# Altium PCB [1]BMS_AFE.PcbDoc (part 3 of 3)
Units mm, origin at the board's own origin, x right, y up, seen from the top; angles counter-clockwise.
Board outline 110 x 135 mm, 4 copper layers (Top Layer, Layer 1, Layer 2, Bottom Layer), stack 2.022 mm thick; 197 components, 113 nets, 551 pads, 368 vias.
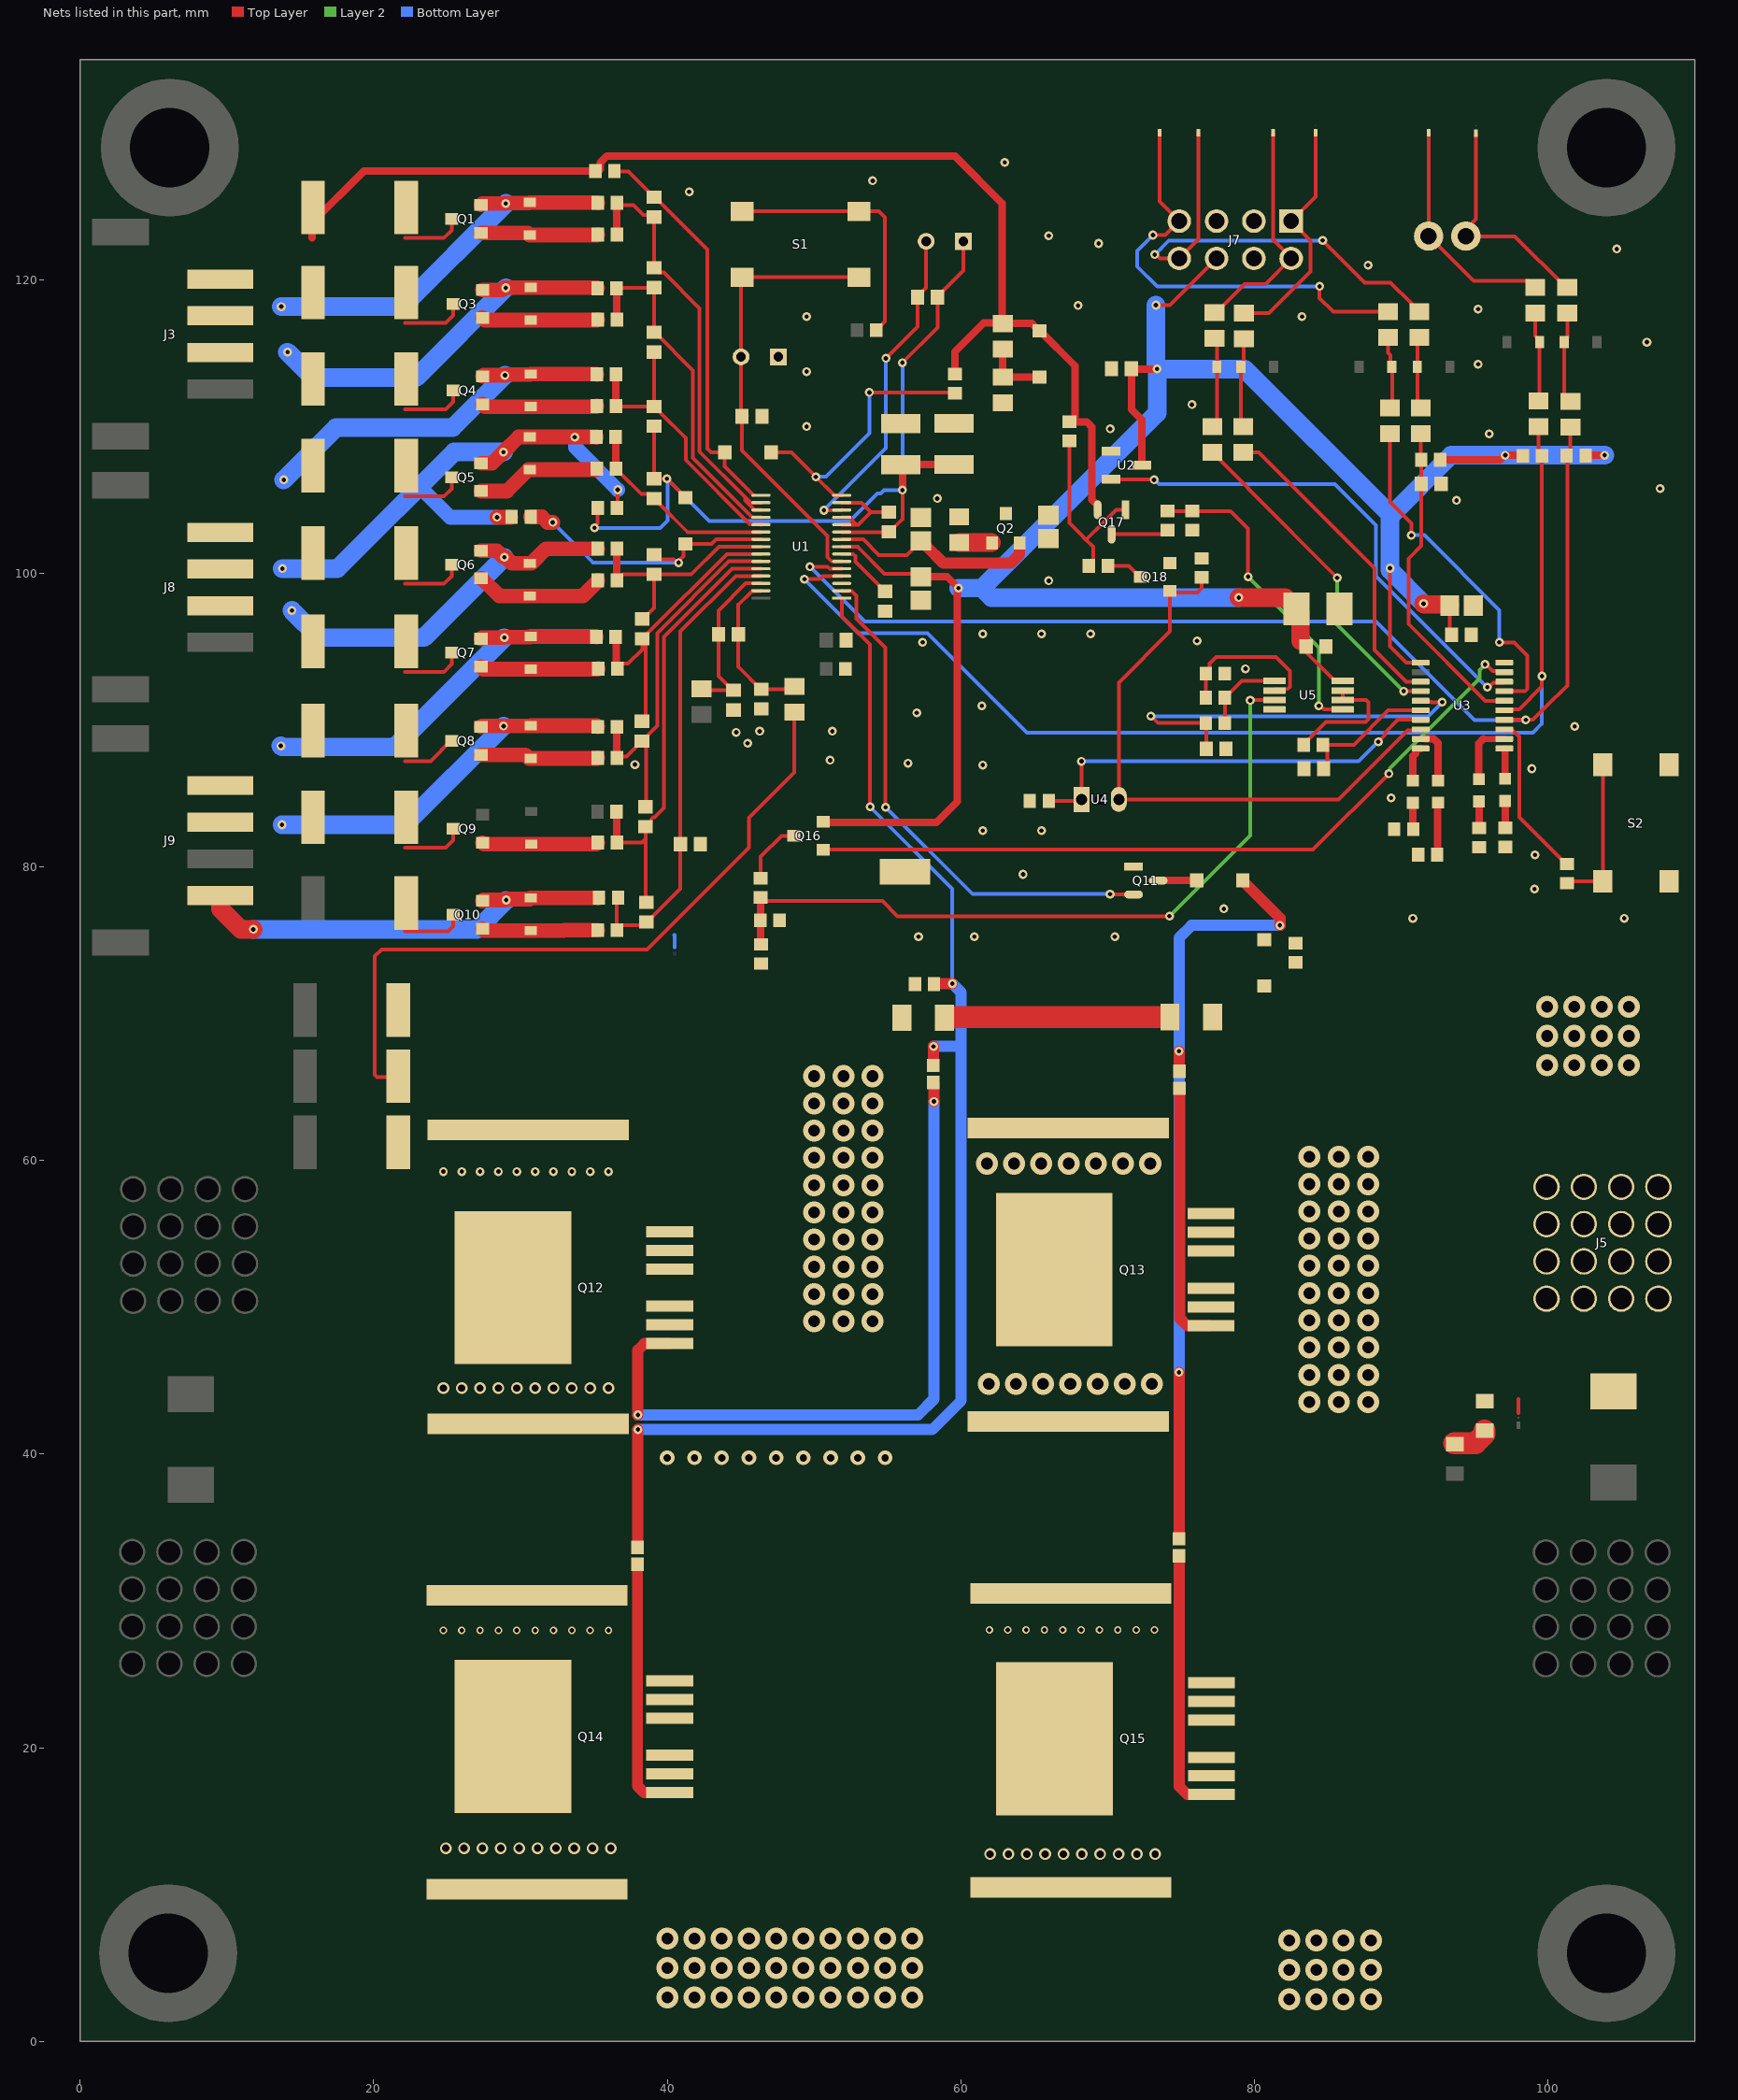
[diagram p4: the nets of this part, all layers, seen from the top]

## Via types
v1: diameter 1.5, hole 0.8, Top Layer to Bottom Layer, 164 vias
v2: diameter 0.61, hole 0.305, Top Layer to Bottom Layer, 135 vias
v3: diameter 0.8, hole 0.5, Top Layer to Bottom Layer, 30 vias
v4: diameter 0.5, hole 0.3, Top Layer to Bottom Layer, 20 vias
v5: diameter 0.6, hole 0.3, Top Layer to Bottom Layer, 10 vias
v6: diameter 1, hole 0.5, Top Layer to Bottom Layer, 9 vias

## Nets (pads, with @x,y where several pads share a name; then routed paths per layer and width w, separated by ;. In a path a pad name is that pad's centre, name@x,y a point inside that pad or via, vN(x,y) a via of type N, cw(c..) or ccw(c..) an arc to the next point about the centre after c; other vN are vias at no path point) (continued)
C10: D1.1 J3.1 Q17.2 R1.1 R2.2 R3.2 R4.1 R58.2 | length 82.8
  Top Layer w0.508: 15.79,122.849 15.79,123.874 19.33,127.414 35.265,127.414 35.265,127.364 35.436,127.535 35.436,127.986 35.875,128.425 59.603,128.425 62.825,125.203 62.825,117.058 61.558,117.058 59.6,115.1 R1.1@59.6,113.575 ; R2.2@62.865,117.018 64.857,117.018 65.35,116.525 65.4,116.525 67.8,114.125 R58.2@67.8,110.325 ; R58.2@67.4,110.325 R58.2@67.8,110.325 ; Q17.2@69.325,104.335 69.325,104.697 69.312,104.71 69.24,104.71 68.934,105.016 68.934,109.966 68.575,110.325 R58.2@67.8,110.325
CAP1: C15.1 U1.7 | length 4.3
  Top Layer w0.254: U1.7@51.891,101.318 52.673,101.318 52.821,101.17 52.821,100.804 54.477,99.148 54.477,99.098 54.8,98.775 C15.1@54.85,98.775
CAP2: C10.1 U1.11 U1.12 U1.14 | length 7
  Top Layer w0.254: U1.11@51.891,103.318 52.897,103.318 ; U1.12@51.891,103.818 52.397,103.818 52.897,103.318 ; U1.14@51.891,104.818 53.24,104.818 53.884,104.175 ; C10.1@55.1,104.175 53.884,104.175 ; 52.897,103.318 53.027,103.318 53.884,104.175
CHG: Q11.2 U1.2 | length 35.7
  Top Layer w0.254: U1.2@51.891,98.818 51.912,98.798 52.563,98.798 52.9,98.461 52.9,96.925 54.875,94.95 v2(54.875,84.075) ; v2(70.175,78.15) 70.187,78.138 71.767,78.138 Q11.2@71.78,78.125
  Bottom Layer w0.254: v2(54.875,84.075) 60.8,78.15 v2(70.175,78.15)
DSG: FB1.2 FB2.2 R41.2 U1.1 | length 93.4
  Top Layer w0.254: U1.1@51.891,98.318 51.891,97.084 53.825,95.15 v2(53.825,84.1)
  Top Layer w0.762: FB1.2@37.975,33.651 38,33.676 v2(38,41.675) ; FB2.2@58.125,66.476 58.15,66.501 v2(58.15,67.775) ; R41.2@58.175,72.025 58.25,72.025 58.275,72.05 v2(59.425,72.05)
  Bottom Layer w0.254: v2(53.825,84.1) 59.425,78.5 v2(59.425,72.05)
  Bottom Layer w0.762: v2(38,41.675) 58.05,41.675 60.025,43.65 60.025,67.8 ; v2(58.15,67.775) 58.175,67.8 60.025,67.8 ; v2(59.425,72.05) 60.025,71.45 60.025,67.8
FET: HS1.1 HS2.1 HS2.2 HS3.1 HS3.2 HS4.1 HS4.2 Q12.4 Q13.4 Q14.4 Q15.4
  other v1: 40,3 41.856,3 43.711,3 45.567,3 47.422,3 49.278,3 51.134,3 52.989,3 54.845,3 56.7,3 40,5 41.856,5 43.711,5 45.567,5 47.422,5 49.278,5 51.134,5 52.989,5 54.845,5 56.7,5 40,7 41.856,7 43.711,7 45.567,7 47.422,7 49.278,7 51.134,7 52.989,7 54.845,7 56.7,7 61.902,44.777 63.758,44.777 65.613,44.777 67.469,44.777 69.324,44.777 71.18,44.777 73.036,44.777 61.777,59.798 63.633,59.798 65.488,59.798 67.344,59.798 69.199,59.798 71.055,59.798 72.911,59.798
  other v3: 62,12.75 63.25,12.75 64.5,12.75 65.75,12.75 67,12.75 68.25,12.75 69.5,12.75 70.75,12.75 72,12.75 73.25,12.75 24.91,13.155 26.16,13.155 27.41,13.155 28.66,13.155 29.91,13.155 31.16,13.155 32.41,13.155 33.66,13.155 34.91,13.155 36.16,13.155 24.75,44.5 26,44.5 27.25,44.5 28.5,44.5 29.75,44.5 31,44.5 32.25,44.5 33.5,44.5 34.75,44.5 36,44.5
  other v4: 24.75,28 26,28 27.25,28 28.5,28 29.75,28 31,28 32.25,28 33.5,28 34.75,28 36,28 61.952,28.027 63.202,28.027 64.452,28.027 65.702,28.027 66.952,28.027 68.202,28.027 69.452,28.027 70.702,28.027 71.952,28.027 73.202,28.027
GND: C3.1 C5.1 C6.1 C12.1 C13.1 C15.2 C17.1 C21.1 C25.1 C26.2 C29.1 C30.1 C31.1 C32.1 C33.1 C34.2 C35.1 C36.1 J7.3 J7.4 J7.5 J10.1 NT1.1 Q11.1 Q18.2 R30.1 R64.1 R66.1 R67.1 R68.1 R69.1 R70.1 R72.1 R73.1 R74.1 RT2.1 S2.A1 S2.A2 U1.3 U2.1 U3.20 U5.4 | length 0.8
  Bottom Layer w0.254: 40.475,75.35 40.5,75.35 NT1.1@40.5,74.529
  other v2: 57.123,75.25 60.925,75.25 70.5,75.25 90.8,76.5 105.2,76.5 77.925,77.15 99.1,78.5 64.25,79.5 99.133,80.824 61.5,82.475 65.5,82.475 89.325,84.7 98.91,86.697 61.5,86.942 37.8,86.975 56.4,87.075 51.1,87.275 45.475,88.425 44.7,89.175 46.3,89.25 51.25,89.25 101.833,89.574 57,90.5 61.433,90.973 79.4,93.5 57.4,95.3 76.1,95.4 61.5,95.876 65.5,95.876 68.845,95.876 66,99.5 93.775,104.975 58.4,105.1 107.65,105.775 96,109.5 70.177,109.841 49.5,110 75.75,111.5 49.5,113.75 95.25,114.25 106.75,115.75 49.5,117.5 83.25,117.5 95.25,118 68,118.25 87.75,121 104.7,122.1 69.4,122.475 66,123 41.5,126 54,126.75 63,128
ISENSE: C33.2 R61.2 U3.5 | length 27.5
  Top Layer w0.254: v2(72.95,90.275) 72.97,90.275 73.445,89.8 R61.2@76.7,89.8 76.725,89.775 C33.2@76.725,88.05 ; U3.5@91.333,91.324 91.406,91.251 92.088,91.251 92.114,91.225 v2(92.8,91.225)
  Bottom Layer w0.254: v2(72.95,90.275) 91.85,90.275 v2(92.8,91.225)
ISENSE1: C27.1 HS1.2 Q12.2 Q12.3 Q12.5 Q12.6 Q12.7 Q14.2 Q14.3 Q14.5 Q14.6 Q14.7 R40.1 R41.1 R43.2 R44.2 R45.2 R60.1 | length 48.8
  Top Layer w0.254: R44.2@21.675,65.75 21.617,65.692 20.224,65.692 20.075,65.841 20.075,73.925 20.532,74.382 38.637,74.382 45.575,81.32 45.575,83.35 48.665,86.44 R40.1@48.665,90.543
  other v1: 50,49.05 52,49.05 54,49.05 50,50.905 52,50.905 54,50.905 50,52.761 52,52.761 54,52.761 50,54.616 52,54.616 54,54.616 50,56.472 52,56.472 54,56.472 50,58.328 52,58.328 54,58.328 50,60.183 52,60.183 54,60.183 50,62.039 52,62.039 54,62.039 50,63.894 52,63.894 54,63.894 50,65.75 52,65.75 54,65.75
  other v5: 24.75,59.25 26,59.25 27.25,59.25 28.5,59.25 29.75,59.25 31,59.25 32.25,59.25 33.5,59.25 34.75,59.25 36,59.25
  other v6: 40,39.75 41.856,39.75 43.711,39.75 45.567,39.75 47.422,39.75 49.278,39.75 51.134,39.75 52.989,39.75 54.845,39.75
NetC1_1: C1.1 C4.2 R6.2 R7.1 U1.17 U1.18 | length 29.8
  Top Layer w0.254: R7.1@36.565,125.235 36.72,125.08 37.71,125.08 38.373,124.417 38.964,124.417 C1.1@39.105,124.275 C4.2@39.105,120.815 39.428,120.492 39.758,120.492 42.206,118.044 42.206,108.294 45.3,105.2 ; U1.18@46.39,104.318 45.943,104.318 45.3,104.961 45.3,105.2 ; U1.17@46.39,104.818 45.682,104.818 45.3,105.2
  Top Layer w0.508: R6.2@36.565,123.079 R7.1@36.565,125.235
NetC1_2: C1.2 D5.1 R3.1 U1.16 | length 27
  Top Layer w0.254: R3.1@36.565,127.364 37.366,127.364 38.732,125.998 38.732,125.948 39.055,125.625 C1.2@39.105,125.625 39.155,125.625 42.725,122.055 42.725,108.5 42.975,108.25 D5.1@43.925,108.25 43.925,107.278 U1.16@45.863,105.339
NetC3_2: C3.2 Q2.3 R5.1
NetC4_1: C4.1 C7.2 R10.2 R11.1 U1.19 | length 23.7
  Top Layer w0.254: R11.1@36.565,119.44 36.59,119.465 C4.1@39.105,119.465 C7.2@39.105,116.422 39.155,116.422 41.752,113.826 41.752,107.867 45.801,103.818 U1.19@46.39,103.818
  Top Layer w0.508: R10.2@36.565,117.284 R11.1@36.565,119.44
NetC7_1: C7.1 C8.2 R13.2 R14.1 U1.20 | length 20
  Top Layer w0.254: R13.2@36.509,111.393 36.534,111.368 C8.2@39.105,111.368 ; C7.1@39.105,115.072 C8.2@39.105,111.368 ; U1.20@46.39,103.318 46.369,103.339 45.638,103.339 41.256,107.721 41.256,109.218 39.478,110.995 39.478,111.045 39.155,111.368 C8.2@39.105,111.368
  Top Layer w0.508: R13.2@36.509,111.393 R14.1@36.509,113.549
NetC9_2: C9.2 RT1.2 U1.13 | length 22.4
  Top Layer w0.254: v2(50.675,104.3) 50.684,104.309 51.882,104.309 U1.13@51.891,104.318 ; v2(54.9,114.65) 57.065,116.815 C9.2@57.065,118.818 57.065,118.868 57.645,119.448 RT1.2@57.645,122.618
  Bottom Layer w0.254: v2(50.675,104.3) 54.9,108.525 v2(54.9,114.65)
NetC11_2: C11.2 R16.2 R17.1 U1.21 | length 13.8
  Top Layer w0.254: R16.2@36.509,107.139 36.509,107.089 36.807,106.791 36.857,106.791 38.23,105.417 38.782,105.417 C11.2@39.105,105.094 39.155,105.094 39.478,104.771 39.478,104.721 41.381,102.818 U1.21@46.39,102.818
  Top Layer w0.508: R16.2@36.509,107.139 R17.1@36.509,109.259
NetC13_2: C13.2 RT2.2 S1.A1 S1.A2 U1.6 | length 30.9
  Top Layer w0.254: C13.2@45.03,110.68 RT2.2@45.03,114.75 45.03,120.084 S1.A2@45.115,120.168 S1.A1@53.065,120.168 ; C13.2@45.425,110.725 45.125,110.725 C13.2@45.1,110.7 45.1,108.375 50.925,102.55 50.925,101.1 51.186,100.839 51.87,100.839 U1.6@51.891,100.818
NetC14_1: C14.1 C16.2 R21.2 R26.1 U1.23 | length 16.3
  Top Layer w0.254: R21.2@36.565,99.526 36.565,99.576 36.863,99.874 36.913,99.874 36.968,99.929 C14.1@39.105,99.929 ; C16.2@38.3,96.9 38.35,96.9 39.105,97.655 C14.1@39.105,99.929 ; U1.23@46.39,101.818 43.525,101.818 41.636,99.929 C14.1@39.105,99.929
  Top Layer w0.508: R21.2@36.565,99.576 R26.1@36.565,101.682
NetC14_2: C14.2 D3.1 R19.1 U1.22 | length 19.9
  Top Layer w0.254: C14.2@39.105,101.279 39.428,100.956 40.448,100.956 40.679,100.725 v2(40.775,100.725) 40.775,100.821 41.125,101.171 D3.1@41.125,101.925 ; D3.1@41.225,102 43.034,102 43.352,102.318 U1.22@46.39,102.318
  Top Layer w1: R19.1@30.7,103.85 31.469,103.85 31.844,103.475 v2(32.2,103.475)
  Bottom Layer w0.254: v2(32.2,103.475) 34.95,100.725 v2(40.775,100.725)
NetC16_1: C16.1 C18.2 R27.2 R28.1 U1.24 | length 21.5
  Top Layer w0.254: R27.2@36.602,93.514 36.602,93.564 36.9,93.862 37.337,93.862 38.3,94.825 C16.1@38.3,95.55 ; C18.2@38.275,89.925 38.525,90.175 38.525,95.325 C16.1@38.3,95.55 ; U1.24@46.39,101.318 44.068,101.318 38.673,95.923 38.673,95.873 38.35,95.55 C16.1@38.3,95.55
  Top Layer w0.508: R28.1@36.475,95.675 36.539,95.611 36.539,93.577 R27.2@36.583,93.532
NetC18_1: C18.1 C19.2 R31.2 R32.1 U1.25 | length 25.9
  Top Layer w0.254: R31.2@36.565,87.429 36.662,87.526 37.222,87.526 37.902,88.206 37.902,88.252 38.225,88.575 C18.1@38.275,88.575 ; C19.2@38.525,84.1 38.575,84.15 38.575,88.275 C18.1@38.275,88.575 ; U1.25@46.39,100.818 44.211,100.818 39.321,95.929 39.321,89.621 38.648,88.948 38.648,88.898 38.325,88.575 C18.1@38.275,88.575
  Top Layer w0.508: R31.2@36.565,87.429 R32.1@36.565,89.543
NetC19_1: C19.1 C20.2 R34.2 R35.1 U1.26 | length 31.4
  Top Layer w0.254: R34.2@36.565,81.658 38.264,81.658 38.525,81.919 ; C20.2@38.576,77.599 38.525,77.65 38.525,81.919 ; U1.26@46.39,100.318 44.413,100.318 39.776,95.682 39.776,89.738 39.775,89.737 39.775,84.008 39.14,83.373 39.047,83.373 38.898,83.224 38.898,83.073 38.575,82.75 C19.1@38.525,82.75 38.525,81.919
  Top Layer w0.508: R35.1@36.55,83.775 36.55,83.764 36.565,83.749 R34.2@36.565,81.658
NetC20_1: C20.1 C21.2 R37.2 R38.1 U1.27 | length 32.2
  Top Layer w0.254: R37.2@36.565,75.698 R37.2@36.565,75.748 ; R38.1@36.565,77.854 R37.2@36.565,75.748 ; U1.27@46.39,99.818 44.675,99.818 40.9,96.043 40.9,78.523 38.626,76.249 C20.1@38.576,76.249 38.373,76.046 36.863,76.046 R37.2@36.565,75.748
NetC22_1: C22.1 C24.2 | length 2.6
  Top Layer w1.5: C22.1@93.625,40.75 95.075,40.75 95.7,41.375 C24.2@95.7,41.6
NetC27_2: C27.2 C28.1 | length 14.8
  Top Layer w1.5: C27.2@59.381,69.725 59.425,69.769 C28.1@74.15,69.769
NetD1_2: D1.2 R2.1 R5.2 | length 4.4
  Top Layer w0.508: R2.1@62.865,115.268 R5.2@62.865,113.368 65.368,113.368 D1.2@65.375,113.375
NetD2_1: D2.1 J3.2 Q1.2 R7.2 R9.1 | length 26.2
  Top Layer w1: Q1.2@27.315,125.099 27.416,125.2 v2(29,125.2) 29.035,125.235 30.594,125.235 D2.1@30.628,125.27 35.23,125.27 R7.2@35.265,125.235
  Bottom Layer w1.27: v2(13.7,118.175) 21.975,118.175 v2(29,125.2)
NetD2_2: D2.2 Q1.1 R6.1 | length 8
  Top Layer w1: Q1.1@27.315,123.199 30.474,123.199 D2.2@30.628,123.045 35.23,123.045 R6.1@35.265,123.079
NetD4_1: D4.1 J3.3 Q3.2 R11.2 R12.1 | length 26.1
  Top Layer w1: Q3.2@27.415,119.312 28.765,119.312 28.904,119.45 v2(29,119.45) 29.012,119.462 30.675,119.462 D4.1@30.687,119.474 35.23,119.474 R11.2@35.265,119.44
  Bottom Layer w1.27: v2(14.125,115.075) 15.87,113.33 22.88,113.33 v2(29,119.45)
NetD4_2: D4.2 Q3.1 R10.1 | length 7.9
  Top Layer w1: Q3.1@27.415,117.412 27.577,117.249 D4.2@30.687,117.249 35.23,117.249 R10.1@35.265,117.284
NetD6_1: D6.1 J8.1 Q4.2 R14.2 R15.1 | length 25.9
  Top Layer w1: Q4.2@27.415,113.421 27.487,113.494 v2(28.944,113.494) 28.989,113.539 30.643,113.539 D6.1@30.687,113.584 35.174,113.584 R14.2@35.209,113.549
  Bottom Layer w1.27: v2(13.875,106.375) 17.434,109.934 25.384,109.934 v2(28.944,113.494)
NetD6_2: D6.2 Q4.1 R13.1 | length 7.9
  Top Layer w1: Q4.1@27.415,111.521 27.577,111.359 D6.2@30.687,111.359 35.174,111.359 R13.1@35.209,111.393
NetD7_1: D7.1 J8.2 Q5.2 R17.2 R18.2 R19.2 R20.1 | length 40
  Top Layer w0.254: R19.2@29.346,103.825 R19.2@29.365,103.843 ; R18.2@36.565,104.453 36.625,104.514 v2(36.625,105.7)
  Top Layer w1: Q5.2@27.315,107.507 28.082,107.507 v2(28.844,108.269) 29.868,109.293 D7.1@30.64,109.293 R17.2@35.174,109.293 ; v2(28.4,103.825) R19.2@29.346,103.825 ; R17.2@35.175,109.25 35.175,109.293 R17.2@35.175,109.3
  Bottom Layer w1: 23.241,105.791 25.207,103.825 v2(28.4,103.825) ; v2(33.7,109.275) 33.736,109.239 33.736,108.589 v2(36.625,105.7)
  Bottom Layer w1.27: v2(13.775,100.325) 17.529,100.325 25.473,108.269 v2(28.844,108.269)
NetD7_2: D7.2 Q5.1 R16.1 | length 8.5
  Top Layer w1: Q5.1@27.315,105.607 29.075,105.607 30.537,107.068 D7.2@30.64,107.068 35.139,107.068 R16.1@35.209,107.139
NetD8_1: D8.1 J8.3 Q6.2 R25.1 R26.2 | length 26.2
  Top Layer w1: Q6.2@27.315,101.554 28.384,101.554 28.838,101.1 v2(28.9,101.1) 28.996,101.1 29.415,100.681 D8.1@30.64,100.681 30.742,100.681 31.743,101.682 R26.2@35.265,101.682
  Bottom Layer w1.27: v2(14.425,97.475) 16.275,95.625 23.425,95.625 v2(28.9,101.1)
NetD8_2: D8.2 Q6.1 R21.1 | length 8.9
  Top Layer w1: Q6.1@27.315,99.654 27.365,99.654 28.562,98.456 D8.2@30.64,98.456 34.245,98.456 35.265,99.476 R21.1@35.265,99.526
NetD9_1: D9.1 J9.1 Q7.2 R28.2 R29.1 | length 26.3
  Top Layer w1: Q7.2@27.315,95.543 27.396,95.625 v2(28.898,95.625) 28.938,95.665 30.647,95.665 D9.1@30.687,95.706 35.144,95.706 R28.2@35.175,95.675
  Bottom Layer w1.27: v2(13.675,88.25) 13.75,88.175 21.448,88.175 v2(28.898,95.625)
NetD9_2: D9.2 Q7.1 R27.1 | length 8.1
  Top Layer w1: Q7.1@27.315,93.643 27.477,93.481 D9.2@30.687,93.481 35.269,93.481 R27.1@35.302,93.514
NetD10_1: D10.1 J9.2 Q8.2 R32.2 R33.1 | length 25.9
  Top Layer w1: Q8.2@27.315,89.543 27.371,89.6 v2(28.85,89.6) 28.86,89.61 30.678,89.61 D10.1@30.687,89.619 35.189,89.619 R32.2@35.265,89.543
  Bottom Layer w1.27: v2(13.75,82.875) 22.125,82.875 v2(28.85,89.6)
NetD10_2: D10.2 Q8.1 R31.1 | length 8.1
  Top Layer w1: Q8.1@27.315,87.643 30.336,87.643 30.585,87.394 D10.2@30.687,87.394 35.23,87.394 R31.1@35.265,87.429
NetD11_2: D11.2 Q9.1 R34.1 | length 7.9
  Top Layer w1: Q9.1@27.415,81.658 27.514,81.559 D11.2@30.723,81.559 35.166,81.559 R34.1@35.265,81.658
NetD12_1: D12.1 J9.4 Q10.2 R38.2 | length 29.7
  Top Layer w1: Q10.2@27.415,77.693 27.472,77.75 v2(29.025,77.75) 29.093,77.818 30.617,77.818 D12.1@30.687,77.888 35.23,77.888 R38.2@35.265,77.854
  Top Layer w1.27: J9.4@9.55,78.05 9.565,78.035 9.565,77.135 10.95,75.75 v2(11.8,75.75)
  Bottom Layer w1.27: v2(11.8,75.75) 27.05,75.75 v2@29.014,77.714
NetD12_2: D12.2 Q10.1 R37.1 | length 7.9
  Top Layer w1: Q10.1@27.415,75.793 27.544,75.663 D12.2@30.687,75.663 32.954,75.663 32.988,75.698 R37.1@35.265,75.698
NetD13_1: D13.1 Q11.3 | length 2.6
  Top Layer w0.508: Q11.3@73.45,79.075 D13.1@76.075,79.075
NetD13_2: D13.2 D16.2 FB3.2 FB4.2 R42.2 | length 53.6
  Top Layer w0.762: FB3.2@74.875,34.226 v2(74.875,45.575) ; FB4.2@74.875,66.151 v2(74.875,67.45) ; D13.2@79.225,79.075 79.225,79.05 81.75,76.525 v2(81.75,76.025)
  Bottom Layer w0.762: v2(74.875,45.575) 74.875,75.175 75.725,76.025 v2(81.75,76.025)
NetD17_2: D17.2 R50.1 R51.2 | length 6.3
  Top Layer w0.254: R51.2@101.329,117.725 101.329,116.085 101.116,115.873 D17.2@101.116,115.77 101.116,112.152 R50.1@101.544,111.724
NetD18_2: D18.2 R52.1 R53.2 | length 6.1
  Top Layer w0.254: R53.2@99.15,117.725 99.15,116.164 99.441,115.873 D18.2@99.441,115.77 99.441,111.823 R52.1@99.357,111.739
NetD19_2: D19.2 R54.1 R55.2 | length 6.1
  Top Layer w0.254: R54.1@79.24,109.993 79.09,110.143 D19.2@79.09,114.068 79.09,114.171 79.29,114.371 R55.2@79.29,115.993
NetD20_2: D20.2 R46.1 R47.2 | length 6.2
  Top Layer w0.254: R46.1@77.14,109.993 77.452,110.306 D20.2@77.452,114.068 77.452,115.856 R47.2@77.29,116.018
NetD21_2: D21.2 R48.1 R49.2 | length 5
  Top Layer w0.254: R48.1@91.242,116.09 91.107,115.956 91.107,114.092 91.132,114.067 91.132,111.478 R49.2@91.342,111.268
NetD22_2: D22.2 R56.1 R57.2 | length 5
  Top Layer w0.254: R56.1@89.115,116.068 89.115,115.026 89.269,114.872 89.269,114.175 D22.2@89.368,114.076 ; R57.2@89.242,111.268 89.393,111.42 D22.2@89.393,114.076
NetD23_1: D23.1 U3.12 | length 4.3
  Top Layer w0.4: 95.659,88.724 U3.12@97.033,88.724
  Top Layer w0.508: D23.1@95.305,85.967 95.305,88.426 95.603,88.724
NetD23_2: D23.2 R67.2 | length 1.8
  Top Layer w0.508: D23.2@95.305,84.467 95.319,84.453 95.319,82.663 R67.2@95.333,82.649
NetD24_1: D24.1 U3.11 | length 2
  Top Layer w0.508: D24.1@97.089,86 U3.11@97.089,88.02
NetD24_2: D24.2 R68.2 | length 1.8
  Top Layer w0.508: D24.2@97.089,84.5 97.099,84.491 97.099,82.683 R68.2@97.108,82.674
NetD25_1: D25.1 U3.10 | length 2.6
  Top Layer w0.508: D25.1@90.8,85.87 90.8,87.541 90.987,87.728 90.987,88.02 91.041,88.074 U3.10@91.333,88.074
NetD25_2: D25.2 R69.2 | length 1.8
  Top Layer w0.508: D25.2@90.8,84.37 90.817,84.354 90.817,82.59 R69.2@90.833,82.574
NetD26_1: D26.1 U3.9 | length 3.5
  Top Layer w0.508: U3.9@91.679,88.739 92.225,88.739 92.523,88.441 D26.1@92.523,85.892
NetD26_2: D26.2 R70.2 | length 3.6
  Top Layer w0.508: R70.2@92.458,80.849 92.49,80.881 92.49,84.36 D26.2@92.523,84.392
NetE2_2: E2.2 J6.1 R51.1 | length 15.6
  Top Layer w0.254: E2.2@95.1,129.892 95.1,124.132 94.415,123.447 J6.1@94.415,122.975 94.44,122.95 97.754,122.95 101.229,119.475 R51.1@101.329,119.475
NetE3_2: E3.2 J6.2 R53.1 | length 15.7
  Top Layer w0.254: E3.2@91.875,129.917 J6.2@91.875,122.975 94.927,119.923 98.702,119.923 R53.1@99.15,119.475
NetE4_2: E4.2 J7.1 R55.1 | length 16.5
  Top Layer w0.254: R55.1@79.29,117.743 80.993,117.743 83.825,120.575 83.825,122.68 J7.1@82.51,123.995 84.177,125.662 84.177,127.837 84.175,127.84 E4.2@84.175,130.142
NetE5_2: E5.2 J7.2 R47.1 | length 15.7
  Top Layer w0.254: R47.1@77.29,117.768 77.39,117.768 79.328,119.706 80.761,119.706 J7.2@82.51,121.455 82.51,121.505 81.275,122.74 E5.2@81.275,129.891
NetE6_2: E6.2 J7.8 R48.2 | length 31.4
  Top Layer w0.254: v2(73.219,121.718) 73.315,121.718 73.578,121.455 J7.8@74.89,121.455 76.2,122.765 E6.2@76.2,129.992 ; v2(84.658,122.682) 84.658,122.667 87.517,119.808 89.274,119.808 90.694,118.388 90.694,118.288 91.142,117.84 R48.2@91.242,117.84
  Bottom Layer w0.254: v2(73.219,121.718) 74.183,122.682 v2(84.658,122.682)
NetE7_2: E7.2 J7.7 R56.2 | length 30.2
  Top Layer w0.254: v2(73.1,123.05) 73.945,123.05 J7.7@74.89,123.995 73.548,125.337 E7.2@73.548,130.025 ; v2(84.45,119.55) 84.45,118.75 85.382,117.818 R56.2@89.115,117.818
  Bottom Layer w0.254: v2(73.1,123.05) 72.025,121.975 72.025,120.9 73.35,119.575 73.4,119.575 73.425,119.55 v2(84.45,119.55)
NetFB1_1: FB1.1 Q14.1 | length 17.5
  Top Layer w0.762: FB1.1@37.975,32.499 37.975,17.391 38.421,16.945 Q14.1@40.175,16.945
NetFB2_1: FB2.1 Q12.1 | length 49
  Top Layer w0.762: v2(38,42.675) 38,47.089 38.446,47.535 Q12.1@40.175,47.535 ; FB2.1@58.125,65.324 58.173,65.276 58.173,64.027 v2(58.175,64.025)
  Bottom Layer w0.762: v2(38,42.675) 57.1,42.675 58.175,43.75 v2(58.175,64.025)
NetFB3_1: FB3.1 Q15.1 | length 18.1
  Top Layer w0.762: FB3.1@74.875,33.074 74.875,31.426 74.881,31.42 74.881,17.369 75.44,16.81 Q15.1@77.025,16.81
NetFB4_1: FB4.1 Q13.1 | length 17.9
  Top Layer w0.762: FB4.1@74.925,64.924 74.925,56.987 74.919,56.981 74.919,49.256 75.415,48.76 Q13.1@76.95,48.76
NetQ1_3: Q1.3 R4.2 | length 4.2
  Top Layer w0.254: 22.14,122.849 24.796,122.849 25.315,123.368 Q1.3@25.315,124.149
NetQ2_1: Q2.1 R8.1 | length 2.2
  Top Layer w0.254: Q2.1@62.1,102.1 Q2.1@62.125,102.075
  Top Layer w1.27: R8.1@59.9,102.1 Q2.1@62.1,102.1
NetQ3_3: Q3.3 R9.2 | length 4.3
  Top Layer w0.254: 22.14,117.062 24.896,117.062 25.415,117.581 Q3.3@25.415,118.362
NetQ4_3: Q4.3 R12.2 | length 4.3
  Top Layer w0.254: 22.14,111.171 24.896,111.171 25.415,111.69 Q4.3@25.415,112.471
NetQ5_3: Q5.3 R15.2 | length 4.2
  Top Layer w0.254: 22.14,105.257 24.796,105.257 25.315,105.776 Q5.3@25.315,106.557
NetQ6_3: Q6.3 R20.2 | length 4.2
  Top Layer w0.254: 22.14,99.304 24.796,99.304 25.315,99.823 Q6.3@25.315,100.604
NetQ7_3: Q7.3 R25.2 | length 4.2
  Top Layer w0.254: 22.14,93.293 24.796,93.293 25.315,93.812 Q7.3@25.315,94.593
NetQ8_3: Q8.3 R29.2 | length 3.7
  Top Layer w0.254: 22.14,87.207 23.878,87.207 25.265,88.593 Q8.3@25.315,88.593
NetQ9_3: Q9.3 R33.2 | length 4.3
  Top Layer w0.254: 22.14,81.308 24.896,81.308 25.415,81.827 Q9.3@25.415,82.608
NetQ10_3: Q10.3 R36.2 | length 4.2
  Top Layer w0.254: 22.14,75.609 25.062,75.609 25.415,75.962 Q10.3@25.415,76.743
NetQ16_3: Q16.3 R59.2 | length 4.3
  Top Layer w0.254: R59.2@46.375,79.225 46.375,80.706 47.794,82.125 Q16.3@48.625,82.125
NetQ17_1: Q17.1 R58.1 R63.2 | length 12.9
  Top Layer w0.254: R58.1@67.4,109.025 67.4,103.425 68.131,102.694 68.533,102.292 68.597,102.228 ; R63.2@68.725,100.5 69.023,100.798 69.023,101.802 68.597,102.228 ; Q17.1@71.225,104.335 70.576,104.335 69.627,103.386 68.597,102.356 68.597,102.228
NetQ17_3: Q17.3 R62.2 | length 3.9
  Top Layer w0.254: Q17.3@70.275,102.665 73.815,102.665 R62.2@74.1,102.95
NetQ18_3: Q18.3 R63.1 | length 2.5
  Top Layer w0.254: R63.1@70.025,100.5 71.45,100.5 72.2,99.75 Q18.3@72.25,99.75
NetR24_1: R24.1 S1.B1 S1.B2 | length 17.8
  Top Layer w0.254: S1.B2@45.115,124.668 S1.B1@53.065,124.668 54.407,124.668 54.825,124.25 54.825,117.154 54.588,116.916 54.538,116.916 54.24,116.618 R24.1@54.24,116.568
NetR59_1: R59.1 R60.2 R64.2 U5.3 | length 50.3
  Top Layer w0.254: R59.1@46.375,77.875 46.475,77.875 46.675,77.675 54.675,77.675 55.7,76.65 v2(74.225,76.65) ; v2(79.725,91.35) 79.737,91.362 81.363,91.362 U5.3@81.375,91.375
  Top Layer w0.508: R59.1@46.325,77.825 R59.1@46.375,77.875 ; R60.2@46.375,74.725 R59.1@46.375,77.875 ; R59.1@46.375,77.925 R59.1@46.375,77.875
  Layer 2 w0.254: v2(74.225,76.65) 79.725,82.15 v2(79.725,91.35)
NetR61_1: R61.1 R75.2 U5.1 | length 5.6
  Top Layer w0.254: R61.1@78,89.8 R75.2@78,91.525 78,91.575 78.298,91.873 78.348,91.873 79.15,92.675 U5.1@81.375,92.675
NetR62_1: R62.1 R66.2 U5.5 | length 21.8
  Top Layer w0.254: R62.1@74.1,104.25 R66.2@75.775,104.25 78.375,104.25 79.575,103.05 v2(79.575,99.775) ; v2(84.4,90.975) 84.496,90.975 84.746,90.725 U5.5@86.025,90.725
  Layer 2 w0.254: v2(79.575,99.775) 84.4,94.95 v2(84.4,90.975)
NetR71_1: R71.1 S2.B1 S2.B2 | length 10.5
  Top Layer w0.254: R71.1@101.3,78.9 101.425,79.025 S2.B2@103.75,79.025 S2.B1@103.75,86.975
NetR71_2: R71.2 U3.13 | length 11.3
  Top Layer w0.254: U3.13@97.033,89.374 97.106,89.301 97.618,89.301 98.051,88.868 98.051,83.399 101.25,80.2 R71.2@101.3,80.2
NetR74_2: R74.2 R75.1 U5.2 | length 10.7
  Top Layer w0.254: R75.1@76.7,91.525 R74.2@76.7,93.175 76.953,93.428 76.953,93.853 77.4,94.3 81.475,94.3 82.427,93.348 82.427,92.272 82.278,92.123 81.473,92.123 U5.2@81.375,92.025
NetR76_1: R76.1 U5.6 U5.7 | length 8.8
  Top Layer w0.254: R76.1@83.375,88.325 83.375,88.375 84.875,89.875 87.575,89.875 87.775,90.075 87.775,91.225 87.625,91.375 U5.6@86.025,91.375 U5.7@86.025,92.025
PACK: C36.2 R76.2 U3.6 | length 9.5
  Top Layer w0.254: C36.2@84.725,86.7 84.973,86.948 84.973,88.027 R76.2@84.675,88.325 86.779,88.325 89.127,90.674 U3.6@91.333,90.674
PACK-: C24.1 C28.2 D14.1 D16.1 E1.1 J5.1 Q13.2 Q13.3 Q13.5 Q13.6 Q13.7 Q15.2 Q15.3 Q15.5 Q15.6 Q15.7 R42.1 | length 1.5
  Top Layer w0.254: C24.1@95.7,43.6 C24.1@96.073,43.227 ; 98,42.8 98,43.75
  other v1: 82.373,2.873 84.229,2.873 86.084,2.873 87.94,2.873 82.373,4.873 84.229,4.873 86.084,4.873 87.94,4.873 82.373,6.873 84.229,6.873 86.084,6.873 87.94,6.873 83.75,43.55 85.75,43.55 87.75,43.55 83.75,45.405 85.75,45.405 87.75,45.405 83.75,47.261 85.75,47.261 87.75,47.261 83.75,49.116 85.75,49.116 87.75,49.116 83.75,50.972 85.75,50.972 87.75,50.972 83.75,52.828 85.75,52.828 87.75,52.828 83.75,54.683 85.75,54.683 87.75,54.683 83.75,56.539 85.75,56.539 87.75,56.539 83.75,58.394 85.75,58.394 87.75,58.394 83.75,60.25 85.75,60.25 87.75,60.25 99.956,66.485 101.812,66.485 103.667,66.485 105.523,66.485 99.956,68.485 101.812,68.485 103.667,68.485 105.523,68.485 99.956,70.485 101.812,70.485 103.667,70.485 105.523,70.485
READ_ISENSE: Q16.1 U3.19 | length 52.4
  Top Layer w0.254: Q16.1@50.625,81.175 83.992,81.175 v2(89.171,86.354) ; v2(95.725,93.8) 95.788,93.8 96.242,93.347 96.96,93.347 U3.19@97.033,93.274
  Layer 2 w0.254: v2(89.171,86.354) 89.239,86.422 89.239,86.725 95.352,92.837 95.352,93.427 v2(95.725,93.8)
READ_PACK_TMP: Q18.1 R72.2 U3.8 U4.2 | length 41.2
  Top Layer w0.254: Q18.1@74.25,98.8 74.25,96.041 70.77,92.561 U4.2@70.77,84.6 85.752,84.6 90.453,89.301 90.86,89.301 90.933,89.374 U3.8@91.333,89.374 ; Q18.1@74.3,98.75 74.359,98.691 76.118,98.691 76.425,98.999 R72.2@76.425,99.725
REGOUT: C12.2 C29.2 C31.2 C32.2 C34.1 C35.2 J7.6 Q16.2 R22.2 R23.2 R65.2 U1.8 U2.3 U3.1 U5.8 | length 164.2
  Top Layer w0.254: U1.8@51.891,101.818 52.969,101.818 54.805,99.982 57.076,99.982 C12.2@57.29,99.768 ; v2(73.3,118.275) 74.25,118.275 J7.6@77.43,121.455 ; C35.2@83.145,95.405 83.145,95.005 85.475,92.675 U5.8@86.025,92.675 ; v2(89.25,100.35) 89.25,95.042 90.368,93.924 U3.1@91.333,93.924 ; C31.2@93.315,97.818 93.315,95.943 C32.2@93.44,95.818
  Top Layer w0.508: Q16.2@50.625,83.075 50.675,83.025 58.325,83.025 59.775,84.475 v2@59.775,99 ; C12.2@57.29,99.768 59.077,99.768 v2(59.846,99) ; U2.3@72.34,107.368 72.34,110.462 71.625,111.177 C29.2@71.625,113.95 71.65,113.925 v2(73.375,113.925) ; R65.2@92.675,107.725 96.748,107.725 97.073,108.05 v2(97.1,108.05) R22.2@98.266,108.05 ; R23.2@102.577,108.028 102.599,108.05 v2(103.875,108.05)
  Top Layer w1.27: v2(78.95,98.35) 82.105,98.35 82.4,98.055 82.615,98.055 82.88,97.79 C34.1@82.88,97.575 83.145,97.31 C35.2@83.145,95.405 ; v2(91.535,97.935) 91.587,97.883 93.3,97.883 93.315,97.868 C31.2@93.315,97.818
  Bottom Layer w1.27: v2(59.846,99) 61.45,99 ; v2(73.3,118.275) 73.3,114 v2(73.375,113.925) ; v2(78.95,98.35) 62.1,98.35 61.45,99 ; 89.25,103.891 93.409,108.05 v2(97.1,108.05) v2(103.875,108.05) ; v2(91.535,97.935) 89.25,100.221 89.25,104.006 79.331,113.925 v2(73.375,113.925) ; 61.45,99 73.375,110.925 v2(73.375,113.925)
REGSRC: C6.2 Q2.2 U1.9 | length 14.6
  Top Layer w0.254: U1.9@51.891,102.318 53.357,102.318 54.425,101.25 56.321,101.25 C6.2@57.29,102.218
  Top Layer w0.762: C6.2@57.29,102.218 57.34,102.218 57.609,101.949 57.609,101.899 58.808,100.7 63.4,100.7 64.006,101.306 64.006,102.056 Q2.2@64.025,102.075
RST: U2.2 U3.18 | length 34.8
  Top Layer w0.254: U2.2@70.24,106.418 70.261,106.397 73.153,106.397 v2(73.175,106.375) ; v2(95.886,92.246) 95.982,92.246 96.287,92.551 96.96,92.551 U3.18@97.033,92.624
  Bottom Layer w0.254: v2(73.175,106.375) 73.219,106.375 73.502,106.093 85.474,106.093 88.288,103.279 88.288,99.822 95.864,92.246 v2(95.886,92.246)
SBTWDIO: C30.2 R49.1 R65.1 U3.16 | length 22
  Top Layer w0.254: R65.1@91.358,107.742 R49.1@91.358,109.502 ; R65.1@91.375,107.725 C30.2@91.375,106.1 91.375,101.875 90.5,101 90.5,96.55 95.726,91.324 U3.16@97.033,91.324
  Top Layer w0.508: R49.1@91.342,109.518 R49.1@91.358,109.502 ; R65.1@91.358,107.742 R65.1@91.375,107.725
SBTWTCK: R57.1 U3.17 | length 24
  Top Layer w0.254: R57.1@89.242,109.518 89.242,104.858 90.7,103.4 v2(90.7,102.6) ; v2(96.7,95.3) 97.7,95.3 98.598,94.402 98.598,92.123 98.449,91.974 U3.17@97.033,91.974
  Bottom Layer w0.254: v2(90.7,102.6) 91.59,102.6 96.7,97.49 v2(96.7,95.3)
SCL: R23.1 R50.2 U1.5 U3.14 | length 78.3
  Top Layer w0.254: v2(49.725,100.45) 50.92,100.45 51.061,100.308 51.881,100.308 U1.5@51.891,100.318 ; U3.14@97.033,90.024 v2(98.5,90.024) 98.983,90.024 99.856,90.897 101.325,92.366 101.325,107.98 R23.1@101.277,108.028 101.544,108.295 R50.2@101.544,109.974
  Bottom Layer w0.254: v2(49.725,100.45) 53.452,96.723 88.29,96.723 94.996,90.018 v2@98.5,90.018
SDA: R22.1 R52.2 U1.4 U3.15 | length 81.7
  Top Layer w0.254: v2(49.35,99.6) 49.369,99.619 50.413,99.619 50.612,99.818 U1.4@51.891,99.818 ; U3.15@97.033,90.674 97.106,90.747 98.047,90.747 99.6,92.3 99.6,108.002 R22.1@99.607,108.009 99.357,108.259 R52.2@99.357,109.989
  Bottom Layer w0.254: v2(49.35,99.6) 53.014,95.936 57.739,95.936 64.515,89.16 98.993,89.16 99.6,89.766 v2(99.6,93)
SRN: C23.2 C26.1 R40.2 U1.29 | length 10.7
  Top Layer w0.254: U1.29@46.39,98.818 46.369,98.798 45.78,98.798 44.85,97.868 C23.2@44.85,95.85 44.85,93.633 46.365,92.118 C26.1@46.415,92.118 48.49,92.118 R40.2@48.665,92.293
SRP: C23.1 C25.2 R39.2 U1.28 | length 11.7
  Top Layer w0.254: R39.2@42.34,92.143 42.44,92.043 C25.2@44.465,92.043 ; C25.2@44.515,92.043 C25.2@44.465,92.043 ; U1.28@46.39,99.318 45.355,99.318 43.5,97.463 43.5,93.008 C25.2@44.465,92.043
TMP: R73.2 U3.7 U4.1 | length 29.3
  Top Layer w0.254: R73.2@66,84.5 68.13,84.5 U4.1@68.23,84.6 68.23,87.195 v2(68.225,87.2) ; v2(88.45,88.528) 88.939,89.016 88.939,89.189 89.774,90.024 U3.7@91.333,90.024
  Bottom Layer w0.254: v2(68.225,87.2) 87.122,87.2 v2(88.45,88.528)
UCA0RXD: R54.2 U3.3 | length 21.8
  Top Layer w0.254: R54.2@79.24,108.243 80.296,108.243 88.182,100.357 88.182,94.794 90.352,92.624 U3.3@91.333,92.624
UCA0TXD: R46.2 U3.4 | length 22.9
  Top Layer w0.254: R46.2@77.14,108.243 77.24,108.243 77.688,107.795 77.688,107.695 79.583,105.8 79.583,105.767 v2(85.65,99.7) ; v2@90.176,91.974 U3.4@91.333,91.974
  Layer 2 w0.254: v2(85.65,99.7) 85.65,96.5 v2(90.175,91.975)
VC5X: C2.1 C5.2 C8.1 C9.1 C10.2 C11.1 D3.2 R8.2 R18.1 RT1.1 U1.10 | length 64.2
  Top Layer w0.254: v2(35.05,103.1) 35.05,103.196 35.265,103.411 R18.1@35.265,104.453 ; C8.1@39.105,110.018 C11.1@39.105,106.444 v2(39.986,106.444) 40.877,105.554 40.877,105.473 41.2,105.15 D3.2@41.225,105.15 ; U1.10@51.891,102.818 55.093,102.818 C10.2@55.1,102.825 55.15,102.825 56.025,103.7 v2(56.025,105.675) ; v2(56.025,114.35) 58.415,116.74 C9.1@58.415,118.818 58.415,118.868 60.185,120.638 RT1.1@60.185,122.618
  Top Layer w0.508: C5.2@55.915,107.393 55.927,107.406 59.527,107.406 C2.1@59.54,107.418 ; v2(56.025,105.675) C5.2@56.025,107.283
  Bottom Layer w0.254: v2(35.05,103.1) 39.525,103.1 40.025,103.6 v2@40.025,106.406 ; v2(39.986,106.444) v2@40.025,106.406 ; v2(56.025,114.35) v2(56.025,105.675) 54.775,105.675 54.55,105.45 54.32,105.45 52.451,103.581 42.85,103.581 v2@40.025,106.406
VC10X: C2.2 D5.2 R1.2 U1.15 | length 19.6
  Top Layer w0.254: D5.2@47.075,108.25 48.454,108.25 50.125,106.579 v2(50.125,106.575) 50.129,106.575 51.385,105.318 U1.15@51.891,105.318 ; v2(53.775,112.325) 59.55,112.325 R1.2@59.6,112.275 ; C2.2@59.54,110.218 C2.2@59.6,110.279
  Bottom Layer w0.254: v2(50.125,106.575) 50.136,106.586 50.811,106.586 53.775,109.55 v2(53.775,112.325)
pads on no net: J3.4 J3.5 J3.6 J8.4 J8.5 J8.6 J9.5 J9.6 MP1.1 MP2.1 MP3.1 MP4.1 U4.

## Polygon pours and split planes (outlines as drawn)
NetD4_1 on Top Layer "NETD4_1_L01_P011" (solid, pour order 11): 14.975,111.313 16.623,111.313 16.623,115 16.05,115.375 15.275,115.7 7.548,115.7 7.548,114.475 13.737,114.475 14.724,113.101
GND on Top Layer "GND_L01_P049" (solid, pour order 49): 97.533,130.011 98.744,128.8 98.775,128.8 98.775,125.775 101.275,123.275 107.437,123.262 109.2,121.5 109.2,75.5 107.975,74.275 41.775,74.275 40.225,75.825 40.225,128.65 40.1,128.775 41.525,130.2 43.2,130.2
VC5X on Top Layer "VC5X_L01_P000" (solid, pour order 0): 54.525,106.487 54.525,108.225 60.849,108.225 60.875,103.6 60.525,103.25 59.2,103.25 58.975,103.475 58.975,106.175 58.636,106.514
GND on Top Layer "GND_L01_P046" (solid, pour order 46): 49.9,94.175 49.65,93.925 49.65,84.55 50.675,83.525 58.1,83.525 59.2,84.625 59.2,97.975 58.275,98.9 56,98.9 55.9,98.8 55.9,98.325 55.525,97.95 53.325,97.95 51.55,96.175
ISENSE1 on Top Layer "ISENSE1_L01_P035" (solid, pour order 35): 37.8,57.375 37.8,57.325 38.525,56.625 38.525,16.404 38.879,16.05 56.95,16.05 57.325,16.425 57.325,72.8 56.2,73.925 21.4,73.925 20.775,73.3 20.775,57.975 21.425,57.325 21.5,57.375
BATT+ on Top Layer "NONET_L-01_P-001" (solid, pour order 66): 109.1,39.25 109.5,38.85 109.5,11.975 108.9,11.375 93.787,11.375 93.025,12.175 92.95,12.175 92.95,39 93.2,39.25
PACK- on Top Layer "PACK-_L01_P039" (solid, pour order 39): 92.475,42.375 93.15,43.05 93.175,43 108.7,43 109.525,43.825 109.525,72.775 108.375,73.925 76.025,73.925 75.3,73.2 75.3,1.4 76.025,0.675 92.025,0.675 92.475,1.125
FET on Top Layer "FET_L01_P036" (solid, pour order 36): 74.175,63.025 74.55,62.65 74.55,0.525 20.475,0.525 20,1 20,56.5 20.425,56.925 21.1,56.95 36.85,56.95 37.475,56.325 37.45,55.975 37.45,16.35 38.2,15.6 38.525,15.6 57.075,15.6 57.75,16.325 57.75,62.375 58.4,63.025
BATT- on Top Layer "BATT-_L01_P034" (solid, remove dead copper, pour order 34): 19.197,72.153 19.103,43.503 18.45,42.85 1.75,42.85 0.85,43.75 0.85,72.225 1.7,73.075 18.275,73.075
BATT+ on Top Layer "NONET_L-01_P-001" (solid, pour order 65): 1.825,39.2 0.8,38.175 0.8,12.65 1.85,11.6 18.5,11.6 19.3,12.4 19.3,38.275 18.375,39.2
NetC3_2 on Top Layer "NETC3_2_L01_P045" (solid, pour order 45): 62.175,112.425 61.975,112.225 62.025,112.175 62.025,103.525 62.325,103.225 66.65,103.225 66.85,103.425 66.85,112 66.4,112.45
C10 on Top Layer "C10_L01_P013" (solid, remove dead copper, pour order 13): 14.475,122.05 15.525,123.1 16.675,123.1 16.675,126.7 15.293,126.7 12.975,124.879 12.975,123 10.65,120.675 7.625,120.675 7.625,119.425 11.85,119.425
NetD2_1 on Top Layer "NETD2_1_L01_P015" (solid, pour order 15): 12.575,118.175 15.05,120.65 15.05,120.925 16.525,120.925 16.675,120.775 16.662,120.762 16.662,116.925 7.588,116.925 7.587,118.175
NetD10_1 on Top Layer "NETD10_1_L01_P016" (solid, pour order 16): 14.4,82.375 14.625,82.15 14.675,82.15 14.675,81.925 15.125,81.575 16.775,81.575 16.775,85.175 14.875,85.175 13.425,83.725 7.35,83.725 7.3,83.775 7.3,82.375
C1 on Top Layer "C1_L01_P019" (solid, pour order 19): 7.5,81.175 7.5,79.875 11.675,79.875 15.075,76.475 15.075,75.763 16.575,75.763 16.575,79.338 15.087,79.338 13.25,81.175
NetD6_1 on Top Layer "NETD6_1_L01_P020" (solid, remove dead copper, pour order 20): 14.5,104.475 15.575,105.55 16.65,105.55 16.65,109.15 15.384,109.15 13.725,107.846 13.725,106.55 10.625,103.45 7.475,103.45 7.475,102.175 12.2,102.175
NetD7_1 on Top Layer "NETD7_1_L01_P022" (solid, pour order 22): 12.225,100.95 14.45,103.175 16.375,103.175 16.65,102.9 16.65,99.55 14.687,99.55 7.575,99.55 7.575,100.95
NetD9_1 on Top Layer "NETD9_1_L01_P023" (solid, remove dead copper, pour order 23): 14.85,87.475 16.675,87.475 16.675,91.075 15.05,91.075 15.05,90.55 10.7,86.2 7.325,86.2 7.325,84.925 12.3,84.925
NetD8_1 on Top Layer "NETD8_1_L01_P027" (solid, pour order 27): 15.033,93.575 16.6,93.575 16.6,97.125 15.35,98.375 7.525,98.375 7.525,97.125 13.7,97.125 15.033,95.792
NetD13_2 on Top Layer "NETD13_2_L01_P040" (solid, pour order 40): 80.1,74.225 83.375,74.225 83.375,75.925 82.75,76.425 80.8,76.425 80.1,75.85
NetQ6_3 on Top Layer "NETQ6_3_L01_P050" (solid, pour order 50): 21.275,103.325 21.275,99.475 25.375,99.475 26.1,100.2 26.1,102.6 25.401,103.299
NetQ5_3 on Top Layer "NETQ5_3_L01_P051" (solid, pour order 51): 21.35,109.3 21.35,105.45 25.45,105.45 26.175,106.175 26.175,108.575 25.476,109.274
NetQ4_3 on Top Layer "NETQ4_3_L01_P052" (solid, pour order 52): 21.225,115.15 21.225,111.3 25.325,111.3 26.05,112.025 26.05,114.425 25.351,115.124
NetQ3_3 on Top Layer "NETQ3_3_L01_P053" (solid, pour order 53): 21.275,121.075 21.275,117.225 25.375,117.225 26.1,117.95 26.1,120.35 25.401,121.049
NetQ1_3 on Top Layer "NETQ1_3_L01_P054" (solid, pour order 54): 21.275,126.9 21.275,123.05 25.375,123.05 26.1,123.775 26.1,126.175 25.401,126.874
NetQ7_3 on Top Layer "NETQ7_3_L01_P055" (solid, pour order 55): 21.2,97.15 21.2,93.3 25.3,93.3 26.025,94.025 26.025,96.425 25.326,97.124
NetQ8_3 on Top Layer "NETQ8_3_L01_P056" (solid, pour order 56): 21.325,91.25 21.325,87.4 25.425,87.4 26.15,88.125 26.15,90.525 25.451,91.224
NetQ9_3 on Top Layer "NETQ9_3_L01_P057" (solid, pour order 57): 21.325,85.325 21.325,81.475 25.425,81.475 26.15,82.2 26.15,84.6 25.451,85.299
NetQ10_3 on Top Layer "NETQ10_3_L01_P059" (solid, pour order 59): 21.325,79.375 21.325,75.525 25.425,75.525 26.15,76.25 26.15,78.65 25.451,79.349
VC10X on Top Layer "VC10X_L01_P002" (solid, pour order 2): 58.15,109.55 60.95,109.55 60.95,112.15 60.325,112.75 58.625,112.75 58.2,112.2
GND on Bottom Layer "GND_L04_P047" (solid, pour order 47): 97.7,130.098 97.702,130.098 98.3,129.5 98.3,126.8 101.6,123.5 107.6,123.5 109.25,121.85 109.25,119.15 109.25,75.588 107.15,73.488 34.362,73.488 29.65,78.2 29.65,126.85 33.088,130.288 43.25,130.288
BATT+ on Bottom Layer "NONET_L-01_P-001" (solid, pour order 64): 13.1,1.3 13.75,0.65 97,0.65 97.4,1.05 97.4,11.425 98.175,12.2 107.825,12.2 109,13.375 109,39.075 107.482,40.593 2.501,41.288 0.7,39.487 0.7,13.05 2.25,11.5 11.9,11.5 13.1,10.3
BATT- on Bottom Layer "BATT-_L04_P067" (solid, remove dead copper, pour order 67): 54.5,71.5 57.5,68.5 57.5,44.5 56.15,43.15 1.9,43.15 0.575,44.475 0.575,69.975 2.1,71.5
PACK- on Layer 2 "PACK-_L03_P070" (solid, pour order 70): 98.025,35.225 99.25,36.45 108.925,36.45 109.5,37.025 109.5,73.325 108.925,73.9 79.05,73.9 78.2,73.05 78.2,2.05 79.45,0.8 97.1,0.8 98.025,1.725
FET on Layer 2 "FET_L03_P069" (solid, pour order 69): 55.6,16.925 55.7,16.925 56.525,17.75 56.525,72.75 57.35,73.575 76.425,73.575 77.55,72.45 77.55,1.6 76.45,0.5 14.25,0.5 13.3,1.45 13.3,52.475 14.625,53.8 33.475,53.8 34.325,52.95 34.3,52.225 34.3,17.775 35.125,16.95 35.175,16.925
ISENSE1 on Layer 2 "ISENSE1_L03_P068" (solid, pour order 68): 13.7,54.975 13.95,54.725 34.95,54.725 34.95,18.5 36.075,17.375 55.335,17.375 55.975,18.099 55.975,72.4 54.875,73.5 15.775,73.5 13.7,71.425
GND on Layer 1 "NONET_L-01_P-001" (solid, pour order 63): 0.9,134.5 0.9,74.5 109.1,74.5 109.1,134.5 11.9,134.5
PACK- on Layer 1 "PACK-_L02_P073" (solid, pour order 73): 98.175,35.2 99.4,36.425 109.075,36.425 109.65,37 109.65,73.3 109.075,73.875 79.2,73.875 78.35,73.025 78.35,2.025 79.6,0.775 97.25,0.775 98.175,1.7
FET on Layer 1 "FET_L02_P072" (solid, pour order 72): 55.75,16.9 55.85,16.9 56.675,17.725 56.675,72.725 57.5,73.55 76.575,73.55 77.7,72.425 77.7,1.575 76.6,0.475 14.4,0.475 13.45,1.425 13.45,52.45 14.775,53.775 33.625,53.775 34.475,52.925 34.45,52.2 34.45,17.75 35.275,16.925 35.325,16.9
ISENSE1 on Layer 1 "ISENSE1_L02_P071" (solid, pour order 71): 13.85,54.95 14.1,54.7 35.1,54.7 35.1,18.475 36.225,17.35 55.485,17.35 56.125,18.074 56.125,72.375 55.025,73.475 15.925,73.475 13.85,71.4
BATT- on Top Solder "NONET_L01_P081" (solid, pour order 81): 19.197,72.153 19.103,43.503 18.45,42.85 1.75,42.85 0.85,43.75 0.85,72.225 1.7,73.075 18.275,73.075
ISENSE1 on Top Solder "NONET_L01_P082" (solid, pour order 82): 37.8,57.375 37.8,57.325 38.525,56.625 38.525,16.404 38.879,16.05 56.95,16.05 57.325,16.425 57.325,72.8 56.2,73.925 21.4,73.925 20.775,73.3 20.775,57.975 21.425,57.325 21.5,57.375
FET on Top Solder "NONET_L01_P083" (solid, pour order 83): 74.175,63.025 74.55,62.65 74.55,0.525 20.475,0.525 20,1 20,56.5 20.425,56.925 21.1,56.95 36.85,56.95 37.475,56.325 37.45,55.975 37.45,16.35 38.2,15.6 38.525,15.6 57.075,15.6 57.75,16.325 57.75,62.375 58.4,63.025
PACK- on Top Solder "NONET_L01_P084" (solid, pour order 84): 92.475,42.375 93.15,43.05 93.175,43 108.7,43 109.525,43.825 109.525,72.775 108.375,73.925 76.025,73.925 75.3,73.2 75.3,1.4 76.025,0.675 92.025,0.675 92.475,1.125
BATT+ on Top Solder "NONET_L-01_P-001" (solid, pour order 85): 1.825,39.2 0.8,38.175 0.8,12.65 1.85,11.6 18.5,11.6 19.3,12.4 19.3,38.275 18.375,39.2
BATT+ on Top Solder "NONET_L-01_P-001" (solid, pour order 86): 109.1,39.25 109.5,38.85 109.5,11.975 108.9,11.375 93.787,11.375 93.025,12.175 92.95,12.175 92.95,39 93.2,39.25
BATT- on Bottom Solder "NONET_L04_P088" (solid, pour order 88): 54.5,71.5 57.5,68.5 57.5,44.5 56.15,43.15 1.9,43.15 0.575,44.475 0.575,69.975 2.1,71.5
BATT+ on Bottom Solder "NONET_L-01_P-001" (solid, pour order 87): 13.1,1.3 13.75,0.65 97,0.65 97.4,1.05 97.4,11.425 98.175,12.2 107.825,12.2 109,13.375 109,39.075 107.482,40.593 2.501,41.288 0.7,39.487 0.7,13.05 2.25,11.5 11.9,11.5 13.1,10.3

## Other copper
Top Layer:
  region: 52.667,131.103 52.635,131.103 52.635,131.119 52.667,131.119
  region: 52.602,131.103 52.635,131.103 52.635,131.087 52.602,131.087
  pour cut-out: 68.925,85.575 68.925,83.6 70.125,83.6 70.125,85.575 70.1,85.575
Layer 1:
  pour cut-out: 98.2,0.85 98.2,9.6 100.1,11.5 108.975,11.5 109.7,10.775 109.7,1.1 109.025,0.425 108.925,0.525 98.675,0.525
  pour cut-out: 68.915,85.6 68.915,83.6 68.94,83.575 70.175,83.575 70.175,85.6
  pour cut-out: 0.95,11.525 10.375,11.525 11.95,9.95 11.95,0.975 11.8,0.825 1.05,0.825 0.6,1.275 0.6,10.55
  pour cut-out: 11.375,134.45 11.375,125.3 9.9,123.825 9.825,123.9 0.5,123.9 0.625,134.725
  pour cut-out: 98.625,125.95 100.7,123.35 109.275,123.35 109.275,134.825 98.625,134.55
Bottom Layer:
  pour cut-out: 33,74.85 33.533,74.317 40.245,74.317 41.075,73.488 41.112,73.525 42.475,73.525 41.24,74.76 ccw(c40.675,74.411) 40.611,75.072 ccw(c40.611,74.315) 40.075,74.85 33.65,74.85
  pour cut-out: 68.915,85.6 68.915,83.6 70.175,83.6 70.175,85.6

## Silkscreen, mask and mechanical layers (free items; w line width, h text height)
Top Overlay:
  text "CELL MANAGEMENT SYSTEM" at 19.925,131.125 h1.6
  text "RX" at 82.975,125.775 h0.8 r90
  text "GND" at 80.4,125.75 h0.8 r90
  text "GND" at 77.825,125.675 h0.8 r90
  text "Test" at 75.25,125.625 h0.8 r90
  text "SDA" at 88.65,124.95 h1
  text "SCL" at 95.025,124.95 h1
  text "RST" at 70.523,121.277 h0.8
  text "TX" at 84.225,120.95 h0.8
  text "3.3V" at 75.425,119.075 h0.8
  text "GND" at 79.45,119.05 h0.8
Bottom Overlay:
  drawing of 18 lines, arcs and shapes, not listed
  text "ENGG4000 - Team 2" at 58.9,91.225 h1.5
  text "Quynh Nguyen" at 58.9,87.825 h1.5
  text "Eke Kalu" at 58.9,85.55 h1.5
  text "Owen Fletcher" at 58.9,83.35 h1.5
  text "Anh Albert Nguyen" at 58.9,81.35 h1.5
  text "2024-2025" at 99.75,76 h1

## Text inside footprints (layer, text, board x,y; h text height)
Q12: Top Overlay "*" at 40.81,45.948 h1.27 r90; Top 3D Body "*" at 37.457,47.218 h1.27 r90
Q13: Top Overlay "*" at 77.685,47.172 h1.27 r90; Top 3D Body "*" at 74.332,48.442 h1.27 r90
Q14: Top Overlay "*" at 40.81,15.358 h1.27 r90; Top 3D Body "*" at 37.457,16.628 h1.27 r90
Q15: Top Overlay "*" at 77.71,15.222 h1.27 r90; Top 3D Body "*" at 74.357,16.492 h1.27 r90